# Altium PCB pcb1.PcbDoc (part 3 of 3)
Units mil, origin at the board's own origin, x right, y up, seen from the top; angles counter-clockwise.
Board outline 6735 x 5870 mil, 4 copper layers (Top Layer, Layer 1, Layer 2, Bottom Layer), stack 16.756 mil thick; 178 components, 184 nets, 959 pads, 712 vias.
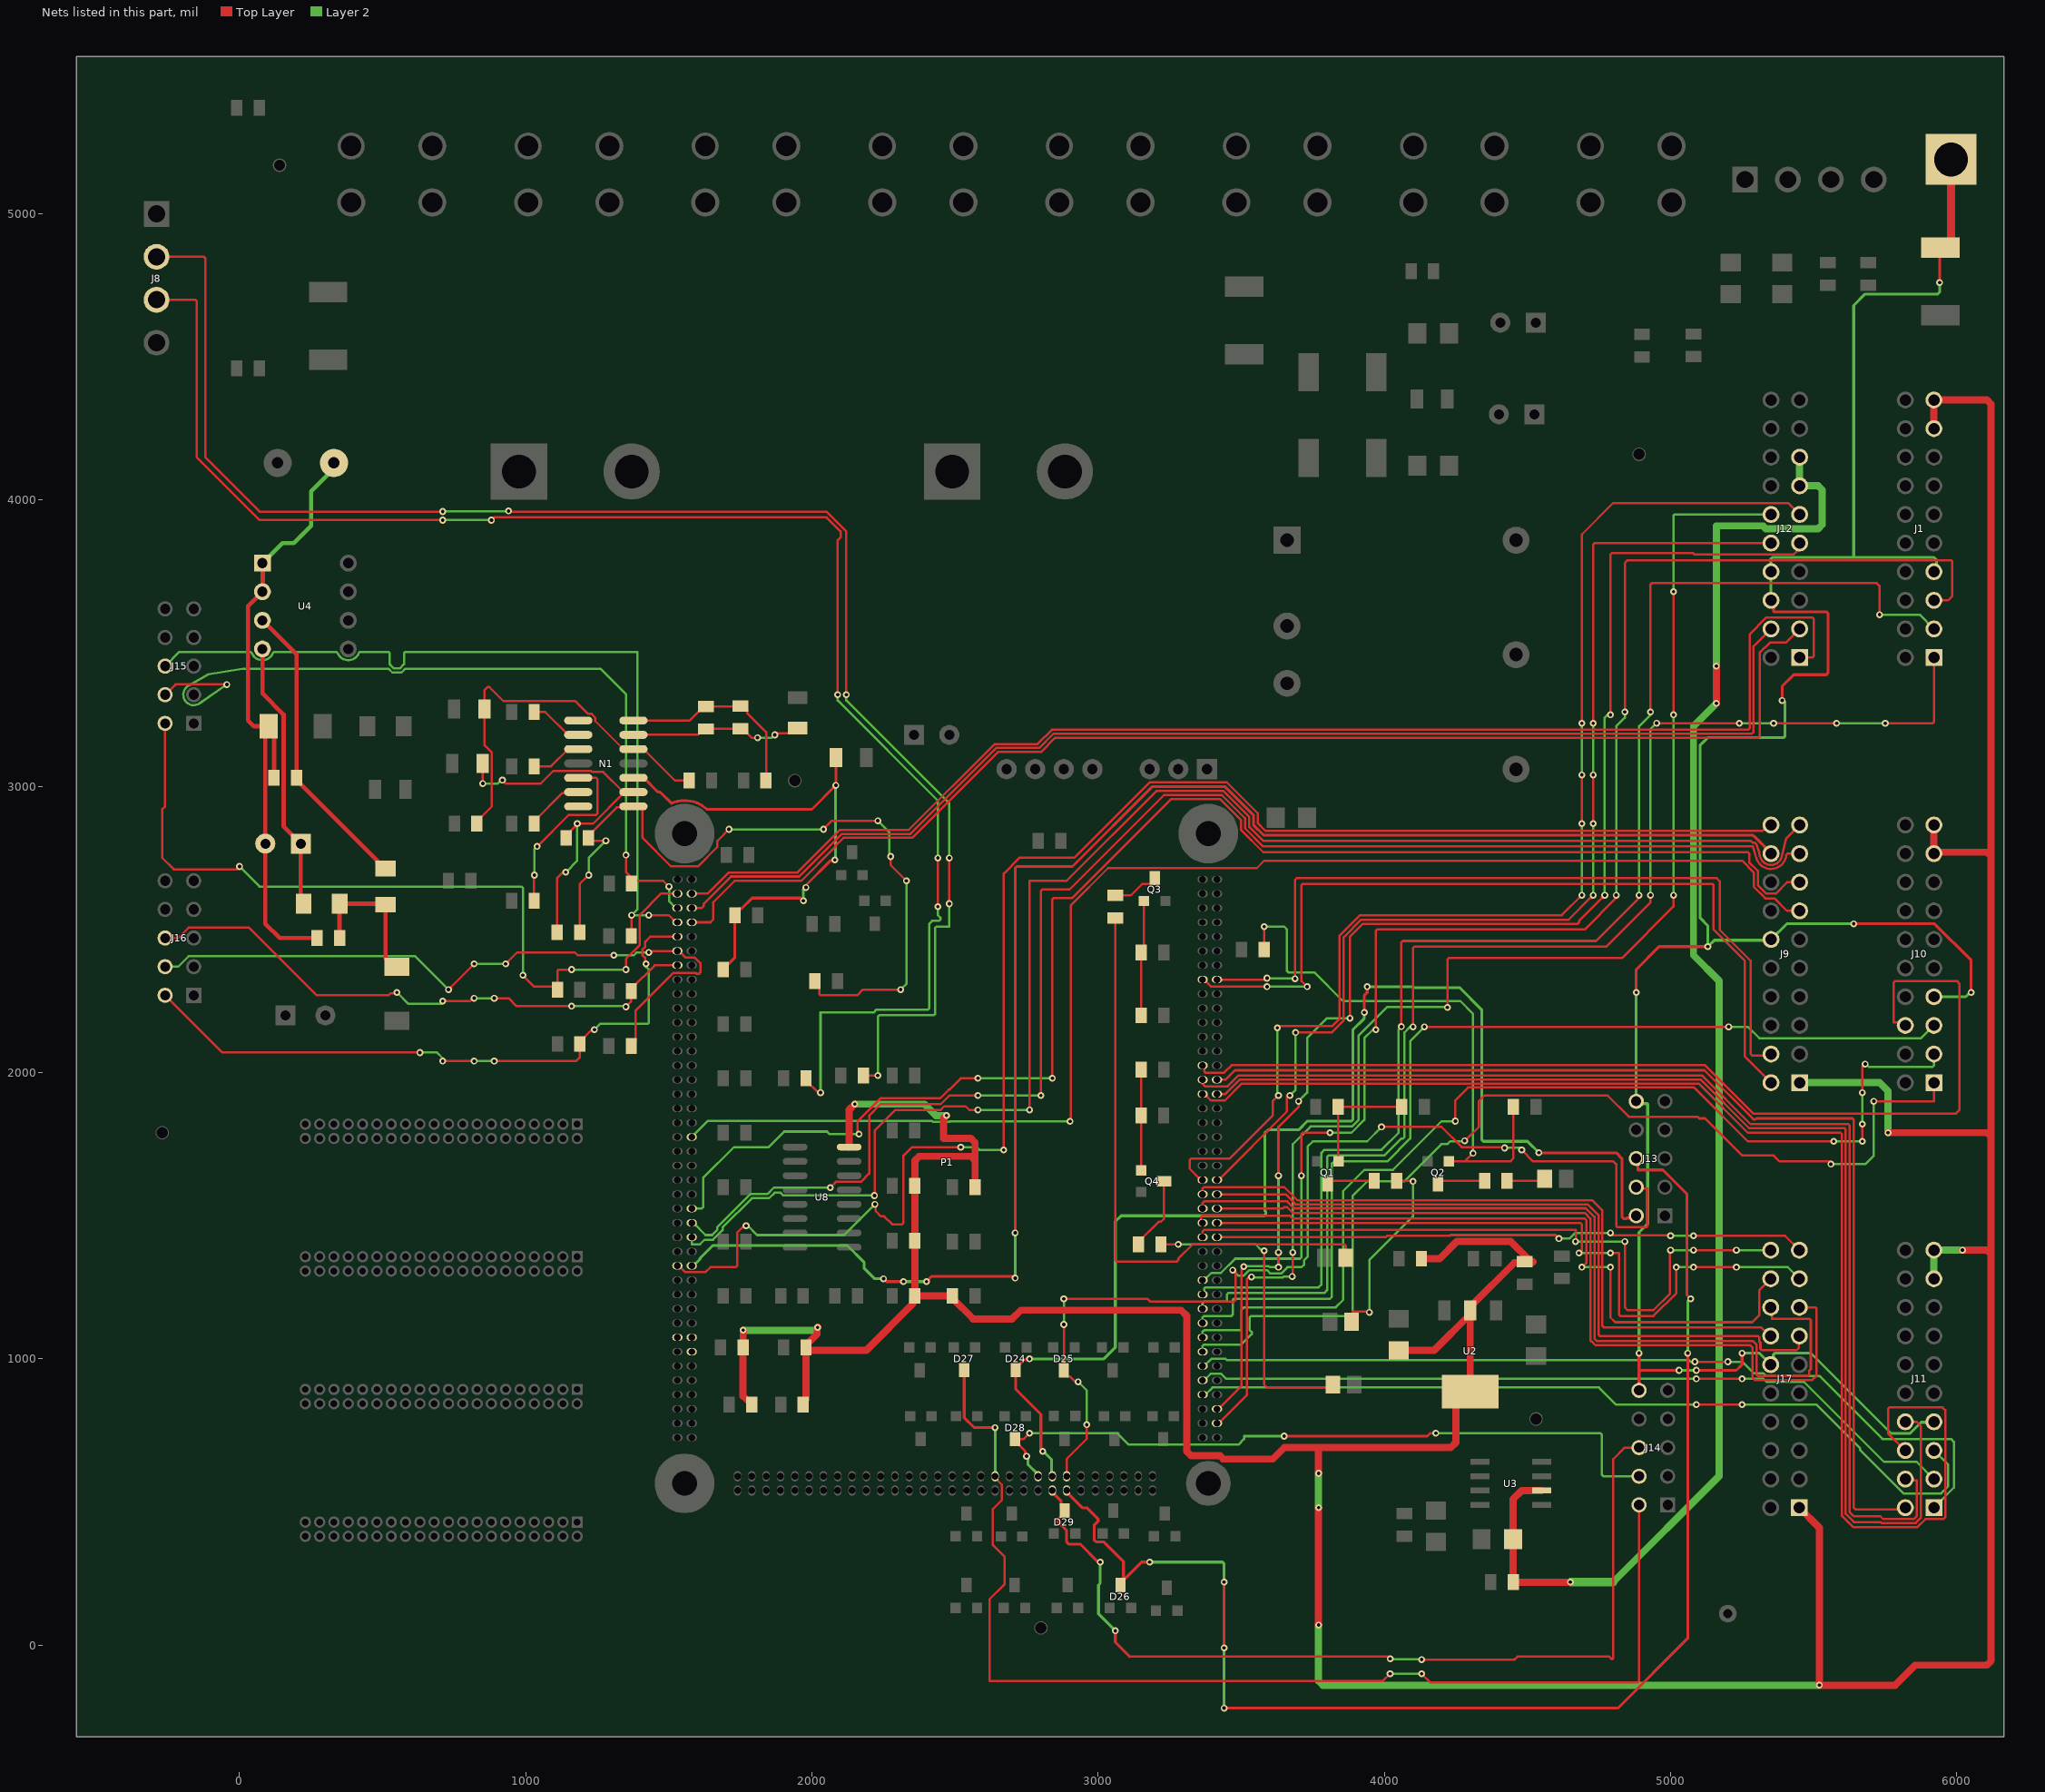
[diagram p5: the nets of this part, all layers, seen from the top]

## Via types
v1: diameter 24, hole 12, Top Layer to Bottom Layer, 712 vias

## Nets (pads, with @x,y where several pads share a name; then routed paths per layer and width w, separated by ;. In a path a pad name is that pad's centre, name@x,y a point inside that pad or via, vN(x,y) a via of type N, cw(c..) or ccw(c..) an arc to the next point about the centre after c; other vN are vias at no path point) (continued)
MQEP2Z: J10.6 P1.28 | length 3612
  Top Layer w8: P1.28@3365,2025 3370,2020 3370,2004.69 3374.69,2000 3440,2000 3466,2026 5120,2026 5290,1856 5996,1856 6010,1870 6010,2310 6000,2320 5784.69,2320 5780,2315.31 5780,2174.69 5810.31,2174.69 J10.6@5820,2165
MQEP3A: J11.2 P1.29 | length 3854.1
  Top Layer w8: P1.29@3415,1975 3445,1975 3478.1,2008.1 5118.1,2008.1 5289.79,1836.41 5296.41,1836.41 5300,1840 5635.31,1840 5640,1835.31 5640,480 5646.69,473.31 5813.31,473.31 J11.2@5820,480
MQEP3B: J11.4 P1.30 | length 4132.7
  Top Layer w8: P1.30@3365,1975 3365,1961 3373.5,1952.5 3452.5,1952.5 3490,1990 5110,1990 5280,1820 5621.31,1820 5626,1815.31 5626,464 5640,450 5733.42,450 5742.95,440.47 5850.47,440.47 5860,450 5860,575.31 5824.69,575.31 J11.4@5820,580
MQEP3S: J11.8 P1.31 | length 4297.7
  Top Layer w8: P1.31@3415,1925 3415.2,1925.2 3445,1925.2 3495.8,1976 5104.2,1976 5274.2,1806 5607.31,1806 5612,1801.31 5612,458.2 5640.2,430 5733.62,430 5737.15,426.47 5856.27,426.47 5874,444.2 5874,766 5860,780 J11.8@5820,780
MQEP3Z: J11.6 P1.32 | length 4815.1
  Top Layer w8: P1.32@3365,1925 3372.12,1925 3394.62,1902.5 3442.1,1902.5 3501.6,1962 5098,1962 5270,1790 5593.31,1790 5598,1785.31 5598,452 5620,430 5620.4,430 5637.93,412.47 5862.47,412.47 5890.47,440.47 5953.67,440.47 5959.53,446.33 5959.53,820.47 5950,830 5764.69,830 5760,825.31 5760,740 J11.6@5820,680
MUSB_BZ: J17.20 P1.52 | length 2458.9
  Top Layer w8: P1.52@3365,1425 3365,1445 3370,1450 4670,1450 4670,1412 v1(4668,1410) ; v1(4840,1410) 4840,1180 4850,1170 4940,1170 4998,1228 4998,1378 v1(5000,1380) ; v1(5080,1380) v1(5230,1380)
  Layer 2 w8: v1(4668,1410) v1(4840,1410) ; v1(5000,1380) v1(5080,1380) ; v1(5230,1380) J17.20@5350,1380
MUSB_DM: J17.14 P1.46 | length 2458.5
  Top Layer w8: P1.46@3365,1575 3365,1595 3369.69,1599.69 3650,1599.69 3695.69,1554 4726,1554 4762,1518 4762,1114.69 4766.69,1110 5315.15,1110 5345.15,1080 J17.14@5350,1080
MUSB_DP: J17.19 P1.51 | length 2076.4
  Top Layer w8: P1.51@3415,1425 4005,1425 4010,1430 4229.16,1430 4231.66,1432.5 4597.5,1432.5 v1(4610,1420) ; v1(4790,1440) 4798,1432 4998,1432 v1(5000,1430) ; v1(5080,1430) 5400,1430 J17.19@5450,1380
  Layer 2 w8: v1(4610,1420) 4646.89,1420 4666.89,1440 v1(4790,1440) ; v1(5000,1430) v1(5080,1430)
MUSB_EN: J17.13 P1.45 | length 2570.8
  Top Layer w8: P1.45@3415,1575 3654.89,1575 3689.89,1540 4710,1540 4748,1502 4748,1084.69 4752.69,1080 5305.31,1080 5310.47,1074.84 5310.47,1059.33 5314,1055.8 5314,1034.69 5318.69,1030 5440,1030 5448.47,1038.47 5448.47,1078.47 J17.13@5450,1080
MUSB_FLT: J17.15 P1.47 | length 2960.7
  Top Layer w8: P1.47@3415,1525 3645,1525 3650,1530 3660.29,1530 3680.29,1510 4700,1510 4720,1490 4720,1064.69 4724.69,1060 4725.09,1060 4737.54,1047.54 5278.46,1047.54 5286,1040 5286,934.69 5294.69,926 5495.31,926 5510,940.69 5510,1175.31 5505.31,1180 J17.15@5450,1180
MUSB_ID: J17.16 P1.48 | length 3079.3
  Top Layer w8: P1.48@3365,1525 3365,1545 3370,1550 3660.09,1550 3684.09,1526 4704,1526 4734,1496 4734,1070.89 4743.34,1061.54 5288.46,1061.54 5300,1050 5300,944.69 5304.69,940 5480.31,940 5485,944.69 5485,959.26 5490,964.26 5490,970 5490,1135.31 5485.31,1140 5354.69,1140 5354.69,1175.31 J17.16@5350,1180
MUSB_INT: J17.17 P1.49 | length 2511.3
  Top Layer w8: P1.49@3415,1475 4685,1475 4690,1470 4690,1374.69 4689.02,1374.69 4684.33,1370 v1(4680,1370) ; v1(4790,1370) 4820,1370 4820,1154.69 4824.69,1150 4940,1150 5020,1230 v1(5020,1320) ; v1(5080,1320) v1(5230,1320)
  Layer 2 w8: v1(4680,1370) v1(4790,1370) ; v1(5020,1320) v1(5080,1320) ; v1(5230,1320) 5410,1320 J17.17@5450,1280
MUSB_VB: J17.18 P1.50 | length 2503.9
  Top Layer w8: P1.50@3365,1475 3360,1480 3360,1495.31 3364.69,1500 3670,1500 3680,1490 4700,1490 4706,1484 4706,1336 v1(4690,1320) ; v1(4790,1320) 4790,1144.69 4806.69,1128 5285.31,1128 5310.47,1153.16 5310.47,1240.47 J17.18@5350,1280
  Layer 2 w8: v1(4690,1320) v1(4790,1320)
NetC21_1: C21.1 D3.2 U4.4 | length 957.5
  Top Layer w15: U4.4@80,3480 80,3324.94 153.82,3251.13 153.82,2860.18 C21.1@214,2800 214,2600.02 D3.2@224.02,2590 D3.2@224.02,2597.87
NetC21_2: C21.2 C22.1 C23.1 D5.2 L3.1 U4.1 U4.2 | length 2236.4
  Top Layer w15: U4.2@80,3680 30,3630 30,3230 50,3210 101.05,3210 D5.2@101.31,3209.74 ; U4.2@81.57,3671.57 81.57,3778.43 U4.1@80,3780 U4.1@90,3790 ; D5.2@101.31,3221.55 D5.2@101.31,3223.84 ; C23.1@120.63,3030 120.63,3190.42 D5.2@101.31,3209.74 ; C22.1@270.63,2470 140,2470 90,2520 C21.2@90,2800 90,3198.43 D5.2@101.31,3209.74
  Layer 2 w15: U4.1@80,3780 150,3850 190,3850 250,3910 250,4030 330,4110 L3.1@330,4130
NetC22_2: C22.2 D3.1 D4.2 Z1.2 | length 526.1
  Top Layer w15: C22.2@349.37,2470 349.37,2589.37 D3.1@350,2590 497.01,2590 Z1.2@510,2577.01 ; Z1.2@510,2587.01 Z1.2@510,2577.01 ; D4.2@550,2370 538.19,2370 510,2398.19 Z1.2@510,2577.01
NetC23_2: C23.2 U4.3 Z1.1 | length 1065.5
  Top Layer w15: U4.3@80,3580 199.37,3460.63 C23.2@199.37,3030 199.37,3022.13 482.07,2739.43 482.07,2733.05 Z1.1@502.13,2712.99 ; Z1.1@517.87,2712.99 Z1.1@510,2712.99 ; Z1.1@502.13,2712.99 Z1.1@510,2712.99 ; Z1.1@502.13,2712.99 Z1.1@510,2712.99
NetC30_1: C30.1 N1.13 R5.1 R15.2 | length 609.3
  Top Layer w8: N1.13@1376.46,3180 1601.5,3180 1622.13,3200.63 R5.1@1630,3200.63 1749.37,3200.63 C30.1@1750,3201.26 1757.87,3201.26 1789.13,3170 v1(1810,3170) ; v1(1870,3180) 1874.33,3180 1880.38,3186.05 1932.35,3186.05 R15.2@1950,3203.7
  Layer 2 w8: v1(1810,3170) 1860,3170 v1(1870,3180)
NetC30_2: C30.2 N1.14 R5.2 R17.1 | length 696.1
  Top Layer w8: N1.14@1376.46,3230 1572.76,3230 1622.13,3279.37 R5.2@1630,3279.37 1749.37,3279.37 C30.2@1750,3280 1757.87,3280 1773.56,3264.31 1773.56,3256.44 1840,3190 R17.1@1840,3020
NetC34_2: C34.2 N1.12 R18.2 R19.2 | length 1359.2
  Top Layer w8: R19.2@829.37,2870 829.37,2877.87 881.65,2930.16 881.65,3117.61 856.3,3142.96 R18.2@856.3,3270 856.3,3336.3 866.69,3346.69 873.31,3346.69 922.44,3297.56 1173.46,3297.56 1217.24,3253.78 1228.83,3253.78 1242.76,3239.85 1242.76,3228.27 1341.02,3130 N1.12@1376.46,3130 1411.89,3130 1521.89,3020 C34.2@1570.63,3020
NetC37_1: C37.1 N1.9 R22.1 R23.2 | length 1346.6
  Top Layer w8: v1(850,3010) R23.2@850,3080 ; v1(918.43,3021.57) 930,3010 1052.52,3010 1096.3,3053.78 1228.83,3053.78 1232.61,3050 1271.02,3050 1341.02,2980 N1.9@1345.11,2980 ; R22.1@1110,2490 1110,2680 1130,2700 v1(1140,2700) ; C37.1@1140.63,2820 1140.63,2827.87 1180,2867.24 v1(1180,2870) 1235.11,2870 1343.07,2977.96 N1.9@1345.11,2980 ; N1.9@1376.46,2980 N1.9@1345.11,2980
  Layer 2 w8: v1(850,3010) 902.54,3010 914.1,3021.57 v1(918.43,3021.57) ; v1(1140,2700) 1180,2740 v1(1180,2870)
NetC37_2: C37.2 N1.8 R22.2 R24.1 | length 2693.7
  Top Layer w8: R22.2@1188.74,2490 1188.74,2659.37 1219.37,2690 v1(1220,2690) ; v1(1280,2810) 1229.37,2810 C37.2@1219.37,2820 1219.37,2827.87 1317.75,2926.26 1372.71,2926.26 N1.8@1376.46,2930 1398.85,2930 1407.89,2920.96 1407.89,2820.42 1507.64,2720.67 1602.36,2720.67 1669.33,2787.64 1669.33,2809.33 v1(1710,2850) ; R24.1@2010,2319.37 2025.31,2304.06 2025.31,2274.69 2030,2270 2157.84,2270 2177.84,2290 v1(2310,2290) ; v1(2040,2850) 2070,2880 v1(2230,2880) ; v1(2275,2755) 2275,2725 v1(2330,2670)
  Layer 2 w8: v1(1220,2690) 1220,2750 v1(1280,2810) ; v1(1710,2850) v1(2040,2850) ; v1(2230,2880) 2270,2840 2270,2760 v1(2275,2755) ; v1(2310,2290) 2330,2310 v1(2330,2670)
NetC39_2: C39.2 N1.10 R25.2 R26.2 | length 1813.5
  Top Layer w10: N1.10@1376.46,3030 1411.89,3030 1461.89,2980 1470,2980 1509.17,2940.83 cw(c1555,2835) 1632.95,2920 2000,2920 v1(2083.7,3003.7) R25.2@2083.7,3100 ; R26.2@1690,2360 1730,2400 C39.2@1730,2540.87 ; C39.2@1731.26,2550 1731.26,2557.87 1745.94,2572.56 1753.82,2572.56 1791.26,2610 1960,2610 v1(1970,2600) ; v1(1979.14,2647) 1979.14,2655 2064.46,2740.32 2077.32,2740.32 v1(2080,2743)
  Layer 2 w10: v1(1970,2600) 1970,2640 1977,2647 v1(1979.14,2647) ; v1(2080,2743) 2081.85,2744.85 2081.85,3001.85 v1(2083.7,3003.7)
NetD1_2: D1.2 R30.2 | length 134.3
  Top Layer w8: R30.2@4428.96,1621.43 4552.16,1621.43 D1.2@4560,1629.28
NetD2_2: D2.2 R31.2 | length 2074.5
  Top Layer w8: R31.2@3060,2540.63 3060,1344.69 3064.69,1340 3275.31,1340 3280,1344.69 3280,1350 3330,1400 3860,1400 3864.69,1395.31 3864.69,1353.45 D2.2@3864.8,1353.33
NetD30_2: D30.2 R49.2 | length 674
  Top Layer w8: D30.2@3884.8,1130 3890,1135.2 3890,1165.5 3944.5,1165.5 v1(3947.25,1162.75) ; R49.2@4043.2,1621.43 4098.57,1621.43 v1(4100,1620)
  Layer 2 w8: v1(3947.25,1162.75) 3947.25,1344.59 4100,1497.34 v1(4100,1620)
NetD31_2: D31.2 R50.2 | length 1086
  Top Layer w8: R50.2@3219.37,1400 v1(3280,1400) ; v1(3580,1378) 3580,910 3590,900 3810,900 D31.2@3820,910
  Layer 2 w8: v1(3280,1400) 3550,1400 3570,1380 3578,1380 v1(3580,1378)
NetJ8_2: J8.2 R28.1 | length 5558.4
  Top Layer w8: J8.2@-290,4850 -124.69,4850 -120,4845.31 -120,4150 70,3960 v1(710,3960) ; v1(940,3962) 942,3960 2050.51,3960 2120,3890.51 v1(2120,3320) ; R28.1@2179.37,1990 v1(2230,1990) ; v1(2480,2590) v1(2480,2750)
  Layer 2 w8: v1(710,3960) 711,3961 939,3961 v1(940,3962) ; v1(2120,3320) 2120,3300 2480,2940 v1(2480,2750) ; v1(2230,1990) 2230,2195.31 2234.69,2200 2425.31,2200 2430,2204.69 2430,2505.31 2434.69,2510 2480,2510 v1(2480,2590)
NetJ8_3: J8.3 R29.1 | length 5644.4
  Top Layer w8: J8.3@-290,4700 -154.69,4700 -150,4695.31 -150,4150 70,3930 v1(710,3930) ; v1(880,3930) 890,3940 2050.71,3940 2100,3890.71 2100,3870 2090,3860 v1(2090,3320) ; R29.1@1979.37,1980 1979.37,1972.13 2021.5,1930 v1(2030,1930) ; v1(2440,2580) v1(2440,2750)
  Layer 2 w8: v1(710,3930) 710.69,3930.69 717.31,3930.69 718,3930 v1(880,3930) ; v1(2030,1930) 2030,2210 2215,2210 2225,2220 2405.31,2220 2410,2224.69 2410,2520 2420,2530 2444,2530 2448.69,2534.69 2448.69,2541.31 2440,2550 v1(2440,2580) ; v1(2090,3320) 2090,3300 2440,2950 v1(2440,2750)
NetN1_2: N1.2 R14.1 | length 187.3
  Top Layer w8: R14.1@1029.37,3260 1068.11,3260 1148.11,3180 N1.2@1183.54,3180
NetN1_3: N1.3 R16.1 | length 179
  Top Layer w8: R16.1@1029.37,3070 1088.11,3070 1148.11,3130 N1.3@1183.54,3130
NetN1_5: N1.5 R21.1 | length 640.9
  Top Layer w8: R21.1@1029.37,2600 1029.37,2689.37 v1(1030,2690) ; v1(1040,2790) 1150,2900 1245.31,2900 1250,2904.69 1250,3025.31 1245.31,3030 N1.5@1183.54,3030
  Layer 2 w8: v1(1030,2690) 1030,2780 v1(1040,2790)
NetN1_6: N1.6 R20.1 | length 204.3
  Top Layer w8: R20.1@1029.37,2870 1029.37,2877.87 1127.75,2976.26 1179.8,2976.26 N1.6@1183.54,2980
NetQ1_1: Q1.1 R51.1 R53.1 | length 393.1
  Top Layer w8: Q1.1@3840.02,1690 3838.74,1691.28 R51.1@3838.74,1880 R53.1@4041.26,1880
NetQ1_3: Q1.3 R49.1 | length 167.2
  Top Layer w8: Q1.3@3802.02,1610 3813.45,1621.43 R49.1@3964.46,1621.43
NetQ2_1: Q2.1 R32.1 R34.1 | length 1958.9
  Top Layer w8: R32.1@3580,2430 v1(3580,2510) ; Q2.1@4225.78,1690 4280,1690 ; v1(4310,1718) 4308,1718 4280,1690 ; R34.1@4450.63,1880 4450.63,1700.63 4440,1690 4280,1690
  Layer 2 w8: v1(3580,2510) 3650,2510 3660,2500 3660,2354.69 3664.69,2350 3755.31,2350 3855.31,2250 4265.31,2250 4310,2205.31 v1(4310,1718)
NetQ2_3: Q2.3 R30.1 | length 167.2
  Top Layer w8: Q2.3@4187.78,1610 4199.22,1621.43 R30.1@4350.22,1621.43
NetQ3_1: Q3.1 R33.1 R35.1 | length 403.5
  Top Layer w8: R35.1@3150.63,2200 R33.1@3150.63,2420 3159.98,2429.35 Q3.1@3159.98,2599.59
NetQ3_3: Q3.3 R31.1 | length 167
  Top Layer w8: R31.1@3060,2619.37 3114.16,2619.37 3153.38,2658.59 3183.98,2658.59 3197.98,2672.59 Q3.3@3197.98,2679.59
NetQ4_1: Q4.1 R52.1 R54.1 | length 352.3
  Top Layer w8: Q4.1@3150,1658 R54.1@3150,1850 3150.63,1850.63 R52.1@3150.63,2010
NetQ4_3: Q4.3 R50.1 | length 261.3
  Top Layer w8: R50.1@3140.63,1400 3140.63,1407.87 3212.76,1480 3220,1480 3230,1490 Q4.3@3230,1620
OnBoardADC_a: N1.1
OnBoardADC_b: N1.7
PE_GND: J1.7 J3.1 J9.12 J10.7 J11.7 J12.6 J12.8 J13.10 J14.10 J17.12 R3.2 | length 8568.5
  Top Layer w10: v1(4880,2280) 4880,2360 4960,2440 v1(5130,2440) ; J14.10@4890,890 4890,954.14 4892.93,957.07 ; v1(4890,1020) 4890,960 4892.93,957.07 ; v1(5030,960) 4895.86,960 4892.93,957.07 ; v1(5090,960) 5230,960 5250,980 v1(5250,1020) ; J12.6@5350.91,3650 5360,3640.91 5360,3610 5360.53,3609.47 5481.8,3609.47 5482.32,3610 5544.14,3610 5550,3604.14 5550,3395.86 5544.14,3390 5430,3390 5390,3350 v1(5390,3300) ; v1(5640,2520) 5922.31,2520 6050,2392.31 v1(6050,2280) ; v1(5940,4760) 5940,4879.17 R3.2@5942.74,4881.91
  Top Layer w30: R3.2@5942.74,4881.91 5959.57,4881.91 5980,4902.35 J3.1@5980,5150
  Layer 2 w10: v1(4880,2280) J13.10@4880,1900 4888.26,1891.74 4918.26,1891.74 4920,1890 4920,1471.89 4890,1441.89 v1(4890,1020) ; v1(5030,960) v1(5090,960) ; v1(5250,1020) 5310,1020 J17.12@5350,980 5359.39,989.39 5359.39,1014.06 5365.86,1020.53 5466.79,1020.53 5467.31,1020 5490,1020 5770.53,739.47 5836.79,739.47 5875.47,778.16 5918.16,778.16 J11.7@5920,780 ; J12.6@5350.91,3650 J12.8@5350.91,3750 5350,3750.91 5350,3794.14 5355.86,3800 5639.88,3800 ; v1(5390,3300) 5394.14,3300 5400,3294.14 5400,3175.86 5394.14,3170 5130,3170 5110,3150 5109.36,3150 5103.5,3144.14 5103.5,2540 5130,2513.5 v1(5130,2440) 5152.5,2462.5 5348.41,2462.5 J9.12@5350.91,2465 5405.91,2520 v1(5640,2520) ; J10.7@5920,2265 6031.21,2265 6046.21,2280 v1(6050,2280) ; J1.7@5920,3750 5929.39,3759.39 5929.39,3789.39 5930,3790 5920,3800 5639.88,3800 ; v1(5940,4760) 5940,4725.86 5934.14,4720 5680,4720 5640,4680 5640,3800.12 5639.88,3800
QEP1_HALL_U: J1.1 P1.62 | length 4656.4
  Top Layer w8: v1(4100,2160) 4100,2435.31 4104.69,2440 4775.31,2440 4780,2444.69 4930,2594.69 v1(4930,2620) ; v1(4951,3221) 4951.5,3220.5 5239.5,3220.5 v1(5240,3220) ; v1(5360,3220) v1(5580,3220) ; v1(5750,3220) 5915.31,3220 5920,3224.69 J1.1@5920,3450
  Layer 2 w8: P1.62@3365,1175 3365,1195 3370,1200 3445.31,1200 3450,1204.69 3450,1225.31 3454.69,1230 3790,1230 3800,1240 3800,1705.31 3804.69,1710 4000,1710 4060,1770 4065.31,1770 4070,1774.69 4070,2140 4090,2160 v1(4100,2160) ; v1(4930,2620) 4930,3200 v1(4951,3221) ; v1(5240,3220) v1(5360,3220) ; v1(5580,3220) v1(5750,3220)
QEP1_HALL_V: J1.3 P1.60 | length 4989.7
  Top Layer w8: v1(4059.44,2160.56) 4059.44,2454.76 4064.69,2460 4740,2460 4890,2610 v1(4890,2620) ; v1(4930,3260) 4930,3705.31 4934.69,3710 5720,3710 5730,3700 v1(5730,3600)
  Layer 2 w8: P1.60@3365,1225 3370,1230 3370,1245.31 3374.69,1250 3770,1250 3780,1260 3780,1720 3790,1730 3990,1730 4050,1790 4050,2150 4059.44,2159.44 v1(4059.44,2160.56) ; v1(4890,2620) 4890,3210 4930,3250 v1(4930,3260) ; v1(5730,3600) 5870,3600 J1.3@5920,3550
QEP1_HALL_W: J1.5 P1.58 | length 5144.1
  Top Layer w8: v1(3710,1640) 3710,1785.31 3714.69,1790 v1(3810,1790) ; v1(3970,2150) 3970,2495.31 3974.69,2500 4700,2500 4810,2610 v1(4810,2620) ; v1(4840,3260) 4840,3780 4850,3790 5980,3790 5984.69,3785.31 5984.69,3664.69 5970,3650 J1.5@5920,3650
  Layer 2 w8: P1.58@3365,1275 3370.5,1275 3395.5,1300 3428.89,1300 3478.89,1350 3705.31,1350 3710,1354.69 v1(3710,1640) ; v1(3810,1790) 3885.15,1790 3930,1834.85 3930,2120 3960,2150 v1(3970,2150) ; v1(4810,2620) 4810,3210 4840,3240 v1(4840,3260)
QEP2_HALL_U: J10.1 P1.68 | length 3647
  Top Layer w8: v1(4280.56,1762) 4282,1762 4330,1810 4330,1900 4350,1920 4780,1920 4854,1846 5094,1846 5100,1840 5120,1840 5250,1710 5360.2,1710 5380.2,1690 5555.31,1690 5555.31,1689.02 5560,1684.33 v1(5560,1680) ; v1(5710,1900) 5919.71,1900 5920,1900.29 J10.1@5920,1965
  Layer 2 w8: P1.68@3365,1025 3365,1045 3370,1050 3500,1050 3536.69,1086.69 3536.69,1093.31 3530,1100 3530,1145.31 3534.69,1150 3885.31,1150 3890,1154.69 3890,1570 3940,1620 4068.89,1620 4198.89,1750 4220,1750 4230,1760 4278.56,1760 v1(4280.56,1762) ; v1(5560,1680) 5680,1680 5710,1710 v1(5710,1900)
QEP2_HALL_V: J10.3 P1.66 | length 3620
  Top Layer w8: v1(4248,1830.56) 4248,1903.31 4292.69,1948 5082,1948 5270,1760 v1(5570,1760) ; v1(5670,1760) v1(5670,1820) ; v1(5670,1930) 5670,2020 v1(5680,2030)
  Layer 2 w8: P1.66@3365,1075 3365,1095 3370,1100 3495.31,1100 3500,1104.69 3500,1170 3510,1180 3829.8,1180 3856,1206.2 3856,1585.8 3930.2,1660 4030,1660 4200,1830 4247.44,1830 v1(4248,1830.56) ; v1(5570,1760) v1(5670,1760) ; v1(5670,1820) v1(5670,1930) ; v1(5680,2030) 5682.69,2030 5692.69,2020 5915.31,2020 5920,2024.69 J10.3@5920,2065
QEP2_HALL_W: J10.5 P1.64 | length 3532
  Top Layer w8: v1(4140,2160) v1(5203,2160)
  Layer 2 w8: P1.64@3365,1125 3365,1145 3370,1150 3465.31,1150 3470,1154.69 3470,1205.31 3474.69,1210 3810,1210 3816,1216 3816,1681.31 3824.69,1690 4010,1690 4090,1770 4090,2110 v1(4140,2160) ; v1(5203,2160) 5270,2160 5310,2120 5875,2120 J10.5@5920,2165
QEP3_HALL_U: J11.1 P1.70 | length 3014.5
  Top Layer w8: v1(5085,990) v1(5200,990)
  Layer 2 w8: P1.70@3365,975 3370.5,975 3395.5,1000 3445.31,1000 3450,995.31 5064.69,995.31 5070,990 v1(5085,990) ; v1(5200,990) 5250,990 5289.9,950.1 5324,950.1 5333.63,940.47 5519.53,940.47 5740,720 5980,720 5990,710 5990,550 J11.1@5920,480
QEP3_HALL_V: J11.3 P1.72 | length 2716.5
  Top Layer w8: v1(5090,930) v1(5250,930)
  Layer 2 w8: P1.72@3365,925 3370.5,925 3393,947.5 3429.82,947.5 3447.32,930 v1(5090,930) ; v1(5250,930) 5324.3,930 5334.77,919.53 5466.37,919.53 5745.43,640.47 5859.53,640.47 J11.3@5920,580
QEP3_HALL_W: J11.5 P1.74 | length 2928.3
  Top Layer w8: v1(5090,840) v1(5250,840)
  Layer 2 w8: P1.74@3365,875 3375,875 3400,900 4750,900 4810,840 v1(5090,840) ; v1(5250,840) 5510,840 5661.81,688.19 5661.81,682.29 5814.1,530 5945.31,530 5970,554.69 5970,630 J11.5@5920,680
REF_3V: C18.1 C20.2 J12.13 J12.15 U3.6 | length 5351.4
  Top Layer w25: U3.6@4550,540 4480,540 4450,510 C18.1@4450,370 C20.2@4450,220 v1(4650,220) ; v1(5160,3290) v1(5160,3420)
  Layer 2 w25: 4799.31,220 5169.5,590.19 5169.5,2320.5 5080,2410 5080,3210 v1(5160,3290) ; v1(5160,3420) 5160,3910 5322.98,3910 5332.98,3900 5515.36,3900 5530,3914.64 5530,4035.36 5515.36,4050 J12.13@5450.91,4050 J12.15@5450.91,4150
  Layer 2 w30: v1(4650,220) 4799.31,220
S\P\I\_\A\_\S\T\E\_\H\S\: J12.10 P1.43 | length 3898.3
  Top Layer w8: P1.43@3415,1625 3420.5,1625 3660,1864.5 v1@3660,1920 ; v1@3660,1920.78 3669.22,1920.78 v1(3670,1920) ; v1(3690,2140) 3814.91,2140 3858,2183.09 3858,2473.11 3918.89,2534 4644,2534 4720,2610 4725.31,2610 4725.31,2610.98 4730,2615.67 v1(4730,2620) ; v1(4730,2870) v1(4730,3040) ; v1(4730,3220) 4730,3845.31 4734.69,3850 J12.10@5350.91,3850
  Layer 2 w8: v1(3670,1920) 3690,1940 v1(3690,2140) ; v1(4730,2620) v1(4730,2870) ; v1(4730,3040) v1(4730,3220)
"SPI B MI HS": P1.147
"SPI B MO HS": P1.145
SPI_A_CK_HS: J12.11 P1.44 | length 4270.9
  Top Layer w8: P1.44@3365,1625 3359.5,1625 3320,1664.5 3320,1695.31 3324.69,1700 3460,1700 3610,1850 3610,1900 v1(3630,1920) ; v1(3626,2156) 3632,2162 3817.11,2162 3844,2188.89 3844,2478.91 3915.09,2550 4620,2550 v1(4690,2620) ; v1(4690,2870) v1(4690,3040) ; v1(4690,3220) 4690,3880 4799.53,3989.53 5411.38,3989.53 J12.11@5450.91,3950
  Layer 2 w8: v1(3626,2156) 3626,1924 v1(3630,1920) ; v1(4690,2620) v1(4690,2870) ; v1(4690,3040) v1(4690,3220)
SPI_A_MI_HS: J12.12 P1.77 | length 4833.5
  Top Layer w8: P1.77@3415,775 3420.5,775 3520,874.5 3520,1280 3527.69,1287.69 3534.31,1287.69 v1(3535.56,1286.44) ; v1(3678,1288) 3680,1290 v1(3680,1372) ; v1(4220,2228) 4220,2395.31 4224.69,2400 4830,2400 5010,2580 v1(5010,2620) ; v1(5010,3250) v1(5010,3680)
  Layer 2 w8: v1(3535.56,1286.44) 3538,1284 3644.91,1284 3648.91,1288 v1(3678,1288) ; v1(3680,1372) 3680,1750 3742,1812 3887.36,1812 3910,1834.64 3910,2130 4010,2230 4218,2230 v1(4220,2228) ; v1(5010,2620) v1(5010,3250) ; v1(5010,3680) 5010,3945.31 5014.69,3950 J12.12@5350.91,3950
SPI_A_MO_HS: J12.9 P1.75 | length 4821.7
  Top Layer w8: P1.75@3415,825 3420.5,825 3500,904.5 3500,1310 3509,1319 v1(3509,1322.11) ; v1(3630,1320) v1(3630,1372) ; v1(3630,1640) 3630,1810 3701.03,1881.03 3701.03,1898.97 v1(3700,1900) ; v1(3880,2190) 3880,2475.31 3924.69,2520 4675.31,2520 4680,2524.69 4680,2530 4760,2610 4765.31,2610 4765.31,2610.98 4770,2615.67 v1(4770,2620) ; v1(4790,3250) 4790,3810 4794.69,3814.69 5078.88,3814.69 5083.09,3810.47 5430.47,3810.47 5441.14,3821.14 5441.14,3840.23 J12.9@5450.91,3850
  Layer 2 w8: v1(3509,1322.11) 3510.89,1324 3595.8,1324 3599.8,1320 v1(3630,1320) ; v1(3630,1372) v1(3630,1640) ; v1(3700,1900) 3730,1930 3730,2120 3800,2190 v1(3880,2190) ; v1(4770,2620) 4770,3240 4780,3250 v1(4790,3250)
SPI_B_CK_HS: P1.146
SPI_C_CK_HS: J12.3 P1.87 | length 4503.4
  Top Layer w8: P1.87@1580,2525 1645,2525 1655,2535 1655,2595 1730,2670 1963.03,2670 2080.91,2787.88 2080.91,2790.91 2110,2820 2350,2820 2650,3120 2800,3120 2849.79,3169.79 5306.69,3169.79 5311.38,3174.48 5311.38,3466.37 5348.31,3503.3 5404.21,3503.3 J12.3@5450.91,3550
SPI_C_MI_HS: J12.4 P1.85 | length 4354.5
  Top Layer w8: P1.85@1580,2575 1615,2575 1621.85,2581.85 1621.85,2589.59 1717.39,2685.13 1955.33,2685.13 2104.2,2834 2344.2,2834 2644.2,3134 2794.2,3134 2843.99,3183.79 5283.79,3183.79 5290,3190 5290,3489.09 J12.4@5350.91,3550
SPI_C_MO_HS: J12.1 P1.83 | length 4695.8
  Top Layer w8: P1.83@1580,2625 1635,2625 1709.13,2699.13 1949.53,2699.13 2098.4,2848 2338.4,2848 2638.4,3148 2788.4,3148 2838.19,3197.79 5271.31,3197.79 5276,3202.48 5276,3530.99 5335.01,3590 5495.31,3590 5500,3585.31 5500,3454.69 5495.31,3450 J12.1@5450.91,3450
UART_SCI_RXDA: J9.17 P1.129 | length 5238.5
  Top Layer w8: v1(2064.21,1598.43) 2083.97,1618.19 2170.53,1618.19 2200,1647.66 2200,1850 2240,1890 2450,1890 2480,1920 v1(2580,1920) ; v1(2800,1920) 2800,2635.31 2804.69,2640 2900,2640 3229.74,2969.74 3431.74,2969.74 3513.33,2888.16 3513.33,2853.37 3576.7,2790 5287.07,2790 5288.82,2784.38 5299.79,2749.1 ccw(c5350.91,2765) 5404.26,2760.66 5408.6,2765 J9.17@5450.91,2765
  Layer 2 w8: P1.129@1580,1475 1585.5,1475 1628,1432.5 1651.39,1432.5 1670,1451.11 1670,1460.91 1784.34,1575.25 1844.34,1575.25 1867.52,1598.43 v1(2064.21,1598.43) ; v1(2580,1920) v1(2800,1920)
UART_SCI_RXDB: J9.15 P1.127 | length 5149.5
  Top Layer w8: v1(2164.45,1785.55) 2160,1790 2160,1830 2240,1910 2447.94,1910 2477.94,1940 2480,1940 2520,1980 v1(2580,1980) ; v1(2840,1980) 2840,2605.31 2844.69,2610 2910,2610 3255.74,2955.74 3425.94,2955.74 3499.33,2882.36 3499.33,2847.57 3576.9,2770 5270.13,2770 5274.82,2765.31 5274.82,2734.98 5304.7,2705.1 5304.7,2655.3 5334.53,2625.47 5367.28,2625.47 5406.81,2665 J9.15@5450.91,2665
  Layer 2 w8: P1.127@1580,1525 1615,1525 1620,1530 1620,1632.11 1727.89,1740 1848.89,1740 1902.89,1794 2052.28,1794 2060.72,1785.55 v1(2164.45,1785.55) ; v1(2580,1980) v1(2840,1980)
UART_SCI_RXDC: J9.18 P1.135 | length 5544.6
  Top Layer w10: v1@2251,1281 v1(2250,1280) 2260,1270 v1(2320,1270) ; v1(2400,1270) 2418,1288 2704,1288 v1(2710,1282) ; v1(2710,1440) 2710,2714.14 2715.86,2720 2910,2720 3188.74,2998.74 3443.76,2998.74 3542.33,2900.17 3542.33,2865.38 3578.15,2829.57 5286.34,2829.57 5299.08,2819 5316.07,2802.01 J9.18@5350.91,2765
  Layer 2 w10: P1.135@1580,1325 1585.5,1325 1609,1348.5 1609,1351.53 1653.47,1396 2123.59,1396 2182.03,1337.56 2182.03,1317.66 2219.7,1280 v1(2250,1280) ; v1(2320,1270) v1(2400,1270) ; v1(2710,1282) v1(2710,1440)
UART_SCI_RXDD: J9.4 P1.15 | length 2836.1
  Top Layer w8: P1.15@3415,2325 3585.31,2325 3590,2329.69 v1(3590,2330) ; v1(3688,2328) 3688,2673.31 3694.69,2680 5160,2680 5172,2668 5172,2498.2 5280,2390.2 5280,2064.69 5284.69,2060 5345.91,2060 J9.4@5350.91,2065
  Layer 2 w8: v1(3590,2330) 3591,2329 3687,2329 v1(3688,2328)
UART_SCI_TXDA: J9.19 P1.131 | length 5403.2
  Top Layer w8: v1(2218.51,1570.38) 2219.07,1570.93 2219.07,1797.32 2291.74,1870 2449.8,1870 2461.8,1882 2537.28,1882 2549.28,1870 v1(2580,1870) ; v1(2760,1870) 2760,2670 2890,2670 3203.74,2983.74 3437.54,2983.74 3527.33,2893.96 3527.33,2859.17 3576.5,2810 5280,2810 5283.66,2806.34 5286,2804 5292.87,2804 5301.07,2795.8 5309.59,2768.43 5309.91,2767 5312.36,2756.23 ccw(c5350.91,2765) 5390.43,2764.89 5404.21,2818.3 J9.19@5450.91,2865
  Layer 2 w8: P1.131@1580,1425 1580,1400 1608.79,1400 1624.79,1416 1654.69,1416 1688,1449.31 1688,1459.11 1790.14,1561.25 1850.14,1561.25 1869.33,1580.44 1890.67,1580.44 1900.18,1570.93 2217.96,1570.93 v1(2218.51,1570.38) ; v1(2580,1870) v1(2760,1870)
UART_SCI_TXDB: J9.13 P1.117 | length 4816.5
  Top Layer w8: v1(2902,1830) 2904.03,1832.03 2904.03,2584.03 3034.59,2714.59 3554.59,2714.59 3580,2740 5250,2740 5290.7,2699.3 5290.7,2649.5 5331.41,2608.8 5363.01,2608.8 5406.81,2565 J9.13@5450.91,2565
  Layer 2 w8: P1.117@1580,1775 1637,1832 2419.11,1832 2423.61,1827.5 2479.32,1827.5 2481.82,1830 v1(2902,1830)
UART_SCI_TXDC: J9.20 P1.136 | length 5523.6
  Top Layer w8: P1.136@1530,1325 1530,1330.5 1532.75,1327.75 1558,1302.5 1627.92,1302.5 1645.42,1320 1734.37,1320 1739.06,1324.69 1739.06,1441.7 1744.91,1447.56 1753.32,1455.96 1753.66,1455.96 1762.69,1465 v1(1770,1465) ; v1(2220,1540) 2223.06,1536.94 2223.06,1515.83 2240.89,1498 2252,1498 2280,1470 2315.31,1470 2320,1474.69 2320,1710 2350,1740 2519.5,1740 v1(2520,1739.5) ; v1(2670,1730) 2670,2695.36 2725.14,2750.49 2916.92,2750.49 3180.17,3013.74 3449.97,3013.74 3557.33,2906.38 3557.33,2871.6 3584.36,2844.57 5320.69,2844.57 5341.12,2865 J9.20@5350.91,2865
  Layer 2 w8: v1(1770,1465) 1776.11,1465 1808.61,1432.5 2112.5,1432.5 v1(2220,1540) ; v1(2520,1739.5) 2520.5,1740 2574.83,1740 2584.83,1730 v1(2670,1730)
UART_SCI_TXDD: J9.2 P1.16 | length 2955.1
  Top Layer w8: P1.16@3365,2325 3370.5,2325 3395.5,2300 v1(3590,2300) ; v1(3730,2300) 3710,2320 3710,2654.66 3714.69,2659.35 5145.31,2659.35 5150,2654.66 5150,2500 5260,2390 5260,2055.91 J9.2@5350.91,1965
  Layer 2 w8: v1(3590,2300) v1(3730,2300)
VCO_ECAP1: J15.2 P1.84 R36.1 | length 2899.6
  Top Layer w8: J15.2@-260,3220 -260,2930 -270,2920 -270,2750 -230,2710 -10,2710 v1(0,2720) ; v1(990,2340) 1030,2300 1110.63,2300 1110.63,2355.31 1115.32,2360 v1(1160,2360) ; v1(1350,2360) 1350,2397.37 1398.43,2445.8 1398.43,2550.98 1472.45,2625 P1.84@1530,2625
  Layer 2 w8: v1(0,2720) 70,2650 985.31,2650 990,2645.31 990,2350 991.69,2348.31 991.69,2341.69 v1(990,2340) ; v1(1160,2360) v1(1350,2360)
VCO_ECAP2: J15.4 P1.86 R37.1 | length 2935.9
  Top Layer w8: J15.4@-260,3320 -223.43,3356.57 -45.26,3356.57 v1(-44.34,3355.66) ; v1(1350,2760) 1350,2700.63 1380,2670.63 1379.37,2670 1480,2670 1500,2650 v1(1500.5,2650)
  Layer 2 w8: v1(-44.34,3355.66) -139.14,3289.96 cw(c-160,3320) -178.09,3351.79 -108.14,3391.66 10,3410 521.85,3410 533.85,3398 566.15,3398 578.15,3410 1262.31,3410 1264.66,3407.66 1350,3322.31 v1(1350,2760) ; v1(1500.5,2650) 1500.5,2599 1524.5,2575 P1.86@1530,2575
VCO_ECAP3: J15.6 P1.88 R39.1 | length 2985.7
  Top Layer w8: R39.1@1368.74,2477.5 1370,2478.76 v1(1370,2550) ; v1(1429.5,2550) 1499.5,2550 1524.5,2525 P1.88@1530,2525
  Layer 2 w8: J15.6@-260,3420 -210,3470 -20,3470 35.66,3470 38.98,3470 42.13,3466.85 45.36,3460.95 ccw(c80,3480) 117.14,3466.46 118.31,3467.64 ; 118.33,3467.66 120.67,3470 335.66,3470 338.98,3470 342.13,3466.85 345.36,3460.95 ccw(c380,3480) 417.14,3466.46 418.31,3467.64 ; 418.33,3467.66 420.67,3470 520.31,3470 522.66,3467.66 525,3465.31 525,3426.64 527.34,3424.3 539.64,3412 560.36,3412 575,3426.64 575,3465.31 579.69,3470 1390,3470 1390,2570 v1(1370,2550) v1(1429.5,2550)
VCO_ECAP4: J16.2 P1.90 R40.1 | length 2294.7
  Top Layer w8: J16.2@-260,2270 -60,2070 v1(630,2070) ; v1(710,2040) v1(820,2040) ; v1(890,2040) 1175.67,2040 1189.37,2053.7 R40.1@1189.37,2100 1189.37,2107.87 1231.5,2150 v1(1240,2150) ; v1(1420,2380) 1416.94,2383.06 1416.94,2401.45 1407.5,2410.89 1407.5,2429.19 1417.5,2439.19 1417.5,2457.5 1435,2475 P1.90@1530,2475
  Layer 2 w8: v1(630,2070) 690,2070 710,2050 v1(710,2040) ; v1(820,2040) v1(890,2040) ; v1(1240,2150) 1260,2170 1425.31,2170 1430,2174.69 1430,2360 1420,2370 v1(1420,2380)
VCO_ECAP5: J16.4 P1.92 R42.1 | length 2464.1
  Top Layer w8: v1(730,2290) 734.33,2290 739.02,2294.69 740,2294.69 740,2300 v1(820,2380) ; v1(930,2380) 970,2420 1171.47,2420 1181.47,2410 v1(1308,2410) ; R42.1@1368.74,2092.5 1384.43,2108.19 1384.43,2216.75 1515.18,2347.5 1594.82,2347.5 1597.01,2345.31 1605.31,2345.31 1610,2350 1610,2382.32 1589.82,2402.5 1558,2402.5 1535.5,2425 P1.92@1530,2425 1445,2425 1440,2420 v1(1429.5,2420)
  Layer 2 w8: J16.4@-260,2370 -214.6,2370 -178.03,2406.57 613.43,2406.57 v1(730,2290) ; v1(820,2380) v1(930,2380) ; v1(1308,2410) 1378,2410 1388,2420 v1(1429.5,2420)
VCO_ECAP6: J16.6 P1.94 R43.1 | length 2033.6
  Top Layer w8: J16.6@-260,2470 -214.6,2470 -178.03,2506.57 33.43,2506.57 270,2270 520,2270 526.94,2276.94 546.94,2276.94 v1(550,2280) ; v1(710,2250) 805.67,2250 815.67,2260 v1(820,2260) ; v1(890,2260) 940,2260 968,2232 v1(1160,2232) ; v1(1350,2230) 1368.74,2248.74 R43.1@1368.74,2285 1368.74,2292.87 1450.87,2375 P1.94@1530,2375
  Layer 2 w8: v1(550,2280) 590,2240 705.31,2240 705.31,2240.98 710,2245.67 v1(710,2250) ; v1(820,2260) v1(890,2260) ; v1(1160,2232) 1348,2232 v1(1350,2230)
VDD: C12.1 C15.2 C33.1 J1.17 J1.19 J9.1 J10.17 J10.19 J11.17 J11.19 J17.1 L2.1 R9.1 R10.1 R11.1 R12.1 R27.2 R38.2 R41.2 R44.2 U2.2 U8.16 | length 16833.5
  Top Layer w25: v1(1760,1100) 1759.69,1099.69 1759.69,1040.32 R44.2@1759.37,1040 1759.37,870 R27.2@1789.37,840 ; R38.2@1969.37,840 1969.37,847.87 1979.37,857.87 R41.2@1979.37,1037.19 ; v1(2020,1110) 2018.09,1108.09 2018.09,1086.59 1979.37,1047.87 R41.2@1979.37,1040 R41.2@1979.37,1037.19 ; U8.16@2130,1740 2130,1870 v1(2150,1890) ; v1(2470,1850) 2460,1840 2460,1770 2555.36,1770 2570,1755.36 2570,1692.86 ; R9.1@2569.37,1600 2570,1600.63 2570,1692.86 ; v1(3770,70) v1(3770,480) ; v1(3770,600) 3770,690 ; C12.1@4050,1029.76 4173.62,1029.76 U2.2@4300,1156.14 ; C15.2@4129.37,1350 4193.28,1350 4253.28,1410 4441.5,1410 4512.13,1339.37 4520,1339.37 4517.3,1336.67 4454.94,1336.67 4300,1181.73 U2.2@4300,1168.94 U2.2@4300,1156.14 ; J17.1@5450,480 5520,410 v1(5520,-140) 5785,-140 5855,-70 6105.36,-70 6120,-55.36 6120,1365.36 ; v1(5760,1790) 6105.36,1790 6120,1775.36 ; J10.19@5920,2865 J10.17@5920,2765 5925,2770 6105.36,2770 6120,2755.36 ; J1.17@5920,4250 J1.19@5920,4350 6105.36,4350 6120,4335.36 6120,2755.36 ; v1(6020,1380) 6105.36,1380 6120,1365.36 ; R41.2@1979.37,1037.19 1986.56,1030 2190,1030 2352.18,1192.18 2352.18,1212.81 R12.1@2359.37,1220 ; R12.1@2359.37,1220 R11.1@2359.37,1412.5 R10.1@2359.37,1605 2360,1605.63 2360,1692.86 2374.64,1707.5 2555.36,1707.5 2570,1692.86 ; R12.1@2359.37,1220 C33.1@2490.63,1220 2490.63,1212.13 2563.26,1139.5 2699.5,1139.5 2730,1170 3290,1170 3310,1150 3310,676.48 3324.64,661.83 3425.11,661.83 3436.94,650 3610,650 3650,690 3770,690 ; 3770,690 4231.86,690 4250,708.14 4250,838.44 4296.56,885 U2.2@4300,885 U2.2@4300,1156.14 ; 6120,1365.36 6120,1775.36 ; 6120,1775.36 6120,2755.36
  Layer 2 w25: v1(1760,1100) 2010,1100 v1(2020,1110) ; v1(2150,1890) 2392.93,1890 2432.93,1850 v1(2470,1850) ; v1(3770,70) 3770,-125.36 3784.64,-140 v1(5520,-140) ; v1(3770,480) v1(3770,600) ; J9.1@5450.91,1965 5730.36,1965 5760,1935.36 v1(5760,1790) ; J11.17@5920,1280 J11.19@5920,1380 v1(6020,1380)
VSO1: D24.3 J13.2 P1.176 | length 4548.2
  Top Layer w10: v1(2760,1000) 2757.32,997.32 2741.93,997.32 2712.02,967.41 D24.3@2712.02,960.41 2712.02,894.2 2800,806.22 2800,686.87 2806.08,680.79 v1(2806.08,677) ; v1(3930,2210) 3930,2270 3940,2280 v1(3940,2300) ; v1(4540,1720) 4810,1720 4830,1700 4830,1495.86 4835.86,1490 4845.86,1490 4847.6,1491.74 4871.74,1491.74 J13.2@4880,1500
  Layer 2 w10: v1(2760,1000) 3020,1000 3060,1040 3060,1480 3080,1500 3580,1500 3585.86,1505.86 3585.86,1514.14 3581.99,1518.01 3581.99,1788.01 3593.98,1800 3700,1800 3730,1830 3884.14,1830 3890,1835.86 3890,2150 3930,2190 v1(3930,2210) ; v1(2806.08,677) 2808.5,677 2837,648.5 2837,593 P1.176@2840,590 ; v1(3940,2300) 4101.89,2300 4105.39,2296.5 4263.5,2296.5 4340,2220 4340,1765.86 4345.86,1760 4500,1760 v1(4540,1720)
VSO2: D25.3 J13.4 P1.174 | length 3777.8
  Top Layer w8: v1(2880,1120) D25.3@2880,960 2880,953 2894,939 2901,939 2920,920 v1(2930,920) ; v1(2880,1210) 3172.16,1210 3182.16,1200 3465.31,1200 3470,1195.31 3480,1205.31 3480,1305.31 3479.02,1305.31 3474.33,1310 v1(3470,1310) ; P1.174@2890,590 2890,650 2960,720 v1(2960,770) ; v1(3990,1810) 4200,1810 4270,1740 4417,1740 v1(4420,1737) ; v1(4480,1730) 4520,1690 4800,1690 4810,1680 4810,1464.69 4814.69,1460 4915.31,1460 4920,1464.69 4920,1595.31 4884.69,1595.31 J13.4@4880,1600
  Layer 2 w8: v1(2880,1120) v1(2880,1210) ; v1(2930,920) 2960,890 v1(2960,770) ; v1(3470,1310) 3490,1290 3508,1290 3528,1310 3590,1310 3602,1298 3639.11,1298 3661.11,1320 3710,1320 3720,1330 3720,1344.89 3732,1356.89 3732,1742 3750,1760 3940,1760 v1(3990,1810) ; v1(4420,1737) 4473,1737 v1(4480,1730)
VSO3: D26.3 J13.6 P1.173 | length 4868.4
  Top Layer w10: P1.173@2890,540 2890,534.5 2944.5,480 2960,480 2999.59,440.41 2999.59,432.12 2986,418.53 2986,367.44 2992.44,361 3019,361 3088.5,291.5 D26.3@3088.5,227.11 ; D26.3@3077.98,209.59 3077.98,216.59 D26.3@3088.5,227.11 ; v1(3180,290) 3151.39,290 D26.3@3088.5,227.11 ; v1(3440,-220) 4816.53,-220 5060,23.47 v1(5060,1020) ; v1(3440,-10) v1(3440,220) ; J13.6@4880,1700 4885.86,1694.14 4885.86,1660 4973.14,1660 5057,1576.14 5057,1223 v1(5070,1210)
  Layer 2 w10: v1(3180,290) 3434.14,290 3440,284.14 v1(3440,220) ; v1(3440,-220) v1(3440,-10) ; v1(5060,1020) 5060,1200 v1(5070,1210)
VSO4: D27.3 J14.2 P1.184 | length 4145.8
  Top Layer w8: P1.184@2640,584.5 2663.5,561 2663.5,506.97 2631.98,475.45 2631.98,349.13 2673.48,307.63 2673.48,213.48 2620,160 2620,-125.31 3994.69,-125.31 v1(4020,-100) ; v1(4130,-100) 4160,-130 4885.31,-130 4890,-125.31 J14.2@4890,490
  Top Layer w10: D27.3@2532.02,960.41 2532.02,794.42 2566.44,760 v1(2640,760) ; P1.184@2640,584.5 P1.184@2640,590
  Layer 2 w8: v1(4020,-100) v1(4130,-100)
  Layer 2 w10: P1.184@2640,590 v1(2640,760)
VSO5: D28.3 J14.4 P1.178 | length 2534.9
  Top Layer w8: D28.3@2710,720 2740,720 v1(2760,740) ; v1(3650,730) 4150,730 4160,740 v1(4180,740)
  Top Layer w10: D28.3@2710,720 2710,713 2745.22,677.78 2745.22,664.78 v1(2750,660)
  Layer 2 w8: v1(2760,740) 3067.16,740 3107.16,700 3490,700 3510,720 3510,730 v1(3650,730) ; v1(4180,740) 4755.31,740 4760,735.31 4760,594.69 4764.69,590 J14.4@4890,590
  Layer 2 w10: v1(2750,660) 2754.78,655.22 2754.78,630.72 2790,595.5 P1.178@2790,590
VSO6: D29.3 J14.6 P1.175 | length 3251.9
  Top Layer w8: 3110,-40 4015.59,-40 4020.27,-44.69 v1(4020.27,-48) ; v1(4130,-50.5) 4454.57,-50.5 4465.07,-40 4785.31,-40 4795.31,-50 4800,-45.31 4800,650 4840,690 J14.6@4890,690
  Top Layer w10: P1.175@2840,540 2840,534.5 2870,504.5 2870,483 D29.3@2883,470 2883,463 2860,440 2860,430 2890,400 2890,360 2897,353 2937,353 3000,290 v1(3007,290) ; v1(3060,50) 3060,10 3110,-40
  Layer 2 w8: v1(4020.27,-48) 4021.52,-49.25 4128.75,-49.25 v1(4130,-50.5)
  Layer 2 w10: v1(3007,290) 3007,215.86 3001.14,210 3001.14,108.86 v1(3060,50)
pads on no net: D25.1 D25.2 D26.1 D26.2 D28.1 D28.2 D29.1 D29.2 J1.15 J1.18 J1.20 J10.15 J10.18 J10.20 J11.15 J11.18 J11.20 J13.5 J14.5 J17.2 J17.4 J17.9 J17.11 P1.19 P1.20 P1.35 P1.36 P1.37 P1.38 P1.39 P1.40 P1.41 P1.42 P1.53 P1.54 P1.55 P1.56 P1.57 P1.59 P1.61 P1.63 P1.65 P1.67 P1.69 P1.71 P1.73 P1.76 P1.78 P1.79 P1.80 P1.91 P1.93 P1.96 P1.98 P1.99 P1.100 P1.101 P1.102 P1.103 P1.104 P1.106 P1.108 P1.110 P1.112 P1.113 P1.114 P1.115 P1.116 P1.118 P1.120 P1.121 P1.122 P1.123 P1.124 P1.125 P1.126 P1.128 P1.130 P1.132 P1.133 P1.134 P1.137 P1.138 P1.139 P1.140 P1.141 P1.142 P1.143 P1.144 P1.148 P1.149 P1.150 P1.151 P1.152 P1.261 P1.262 P1.263 P1.264 R14.2 R16.2 R20.2 R21.2 U1.1 U1.5 U3.1 U3.3 U3.5 U3.7 U3.8 U5.3 U5.5 U5.8
copper on no net: | length 7.1
  Layer 2 w8: 3415,975 3422.12,975
  other v1: 1553.35,498.62 3383.35,498.62 1507.38,517.66 1599.31,517.66 3337.38,517.66 3429.31,517.66 1488.35,563.62 1618.35,563.62 3318.35,563.62 3448.35,563.62 1507.38,609.58 1599.31,609.58 3337.38,609.58 3429.31,609.58 1553.35,628.62 3383.35,628.62 1553.35,2768.62 3388.35,2768.62 1507.38,2787.66 1599.31,2787.66 3342.38,2787.66 3434.31,2787.66 1488.35,2833.62 1618.35,2833.62 3323.35,2833.62 3453.35,2833.62 1507.38,2879.58 1599.31,2879.58 3342.38,2879.58 3434.31,2879.58 1553.35,2898.62 3388.35,2898.62

## Polygon pours and split planes (outlines as drawn)
AGND on Layer 1 (solid, remove dead copper, pour order 22): -560,-250 -550,-260 -550,-300 6140,-300 6140,4530 4280,4530 4280,4860 4070,4860 4070,4530 3910,4530 3910,3390 5050,3390 5060,3380 5060,390 4920,390 4920,3230 3910,3230 3900,3240 3900,2950 3090,2950 3080,2960 3080,3100 3070,3110 2440,3110 2440,2840 1710,2840 1599.31,2787.66 1450,2860 1080,2860 1080,310 860,310 880,330 880,2750 890,2750 1110,2970 2010,2970 2020,2980 2020,3090 1540,3090 1540,3400 910,3400 910,2930 900,2920 450,2920 450,2080 20,2080 20,5490 10,5500 -560,5500
GND_SUS on Layer 1 "Layer 1-GND_SUS" (solid, pour order 11): 2040,3020 2270,3020 2270,3980 3625,3980 3625,4600 2040,4600
no net on Layer 1 "NONET_L02_P009" (solid, pour order 9): -560,5530
D12VGND on Layer 1 "Layer 1-D12VGND" (solid, pour order 8): 1060,2870 2420,2870 2420,3120 3100,3120 3100,2980 3460,2980 3471.13,2991.13 3868.87,2991.13 3870,2990 3880,3000 3880,3280 4950,3280 4950,420 4940,410 5030,410 5030,3370 3880,3370 3880,4540 4060,4540 4060,4870 4300,4870 4300,4550 6080,4550 6080,4810 5860,4810 5860,5520 3980,5520 3980,4620 3740,4620 3650,4530 3650,3960 2310,3960 2310,3320 2310,2960 1120,2960 900,2740 900,330 1060,330
GND on Layer 1 "GND_L02_P003" (solid, remove dead copper, pour order 3): 50,5520 3950,5520 3950,4640 2690,4640 2100,4640 2020,4560 2020,3100 1570,3100 1560,3110 1570,3120 1570,3430 911.17,3430 887.83,3406.66 887.83,2944.64 444.64,2944.64 430,2930 430,2100 90,2100 50,2140
GND on Layer 1 "GND_L02_P000" (solid, pour order 0): 60,5380
no net on Top Layer "NONET_L01_P002" (solid, pour order 2): 30,5370
AGND on Bottom Layer "AGND_L04_P023" (solid, remove dead copper, pour order 23): -570,5550 6165,5550 6165,-320 -570,-320 -570,5550

## Keep-outs
Keep-Out Layer:
  circle w10: c6040,-200 r78.74
  circle w10: c6030,5420 r78.74
  circle w10: c-460,-210 r78.74
  circle w10: c-470,5430 r78.74
  lines w10: -570,-320 6165,-320 6165,5550 -570,5550 -570,-320

## Silkscreen, mask and mechanical layers (free items; w line width, h text height)
Top Overlay:
  text "ECAP1" at -350,3970 h60
  text "DAC" at 5390,3170 h60
  text "QEP1" at 5870,3150 h60
  text "LEM" at 4950,2190 h60
  text "ECAP2" at -350,1980 h60
  text "UART" at 5420,1680 h60
  text "LEM" at 4900,130 h60
  text "USB" at 5350,120 h60
  text "QEP3" at 5800,110 h60

## Text inside footprints (layer, text, board x,y; h text height)
C1: Top Overlay "+" at 4645,4565 h80 r180
C4: Top Overlay "+" at 4640,4245 h80 r180
C21: Top Overlay "+" at 330,2745 h80 r180
C24: Top Overlay "+" at 2116.85,4670 h60
C25: Top Overlay "+" at 603.15,4610 h60
C26: Top Overlay "+" at 2240,3235 h80
C29: Top Overlay "+" at 25,2235 h80
D3: Top Overlay "+" at 431.54,2634.53 h80 r180
P1: Bottom Overlay "PC1" at 3200,635 h60; Bottom Overlay "PB1" at 1627.8,2508 h60 r270; Bottom Overlay "PA1" at 3467.8,2513 h60 r270
Z1: Top Overlay "+" at 465.47,2794.53 h80 r270
Z2: Top Overlay "+" at 365.47,3165.47 h80